# EAGLE board 3400 (EAGLE 9.6.2)
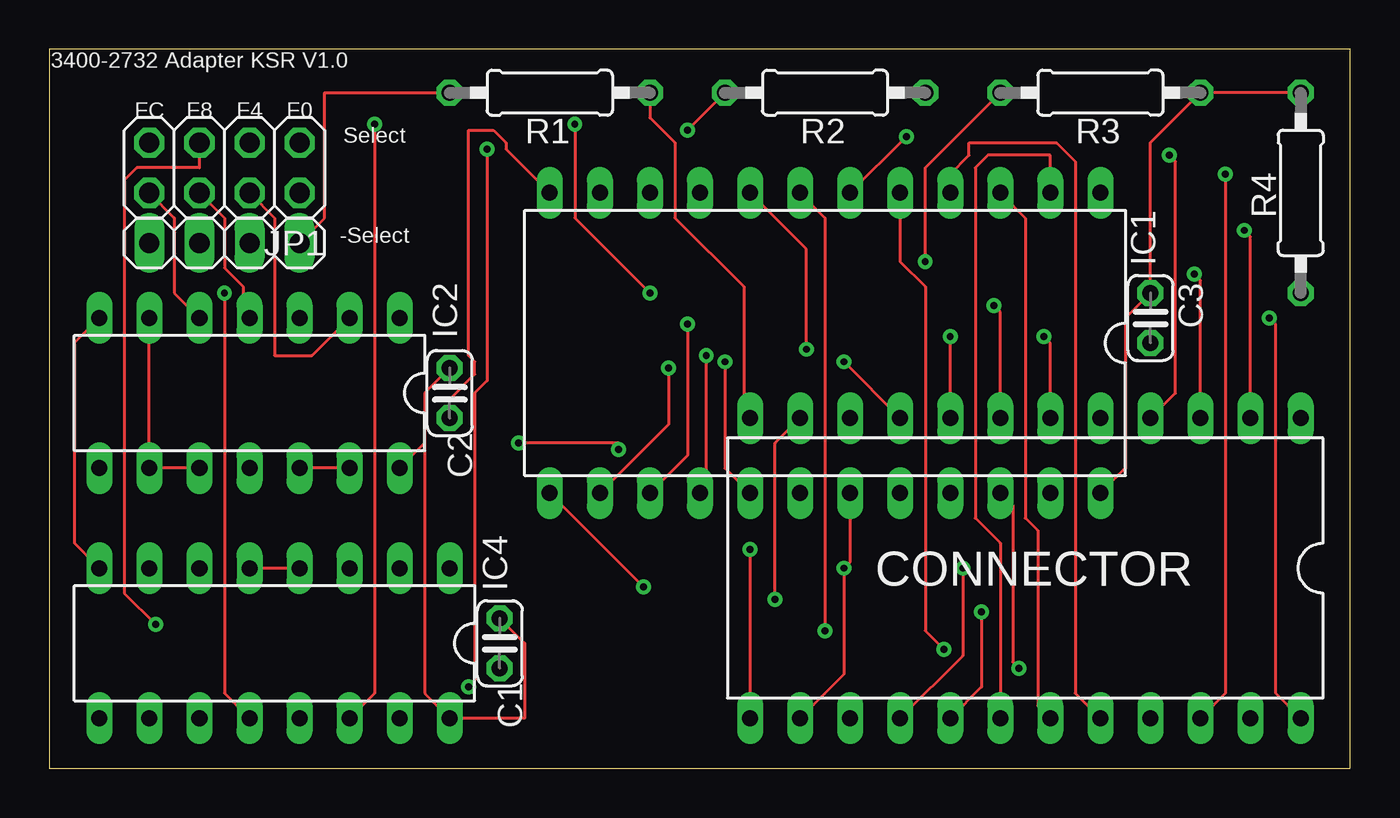
[diagram p0: board, top side]
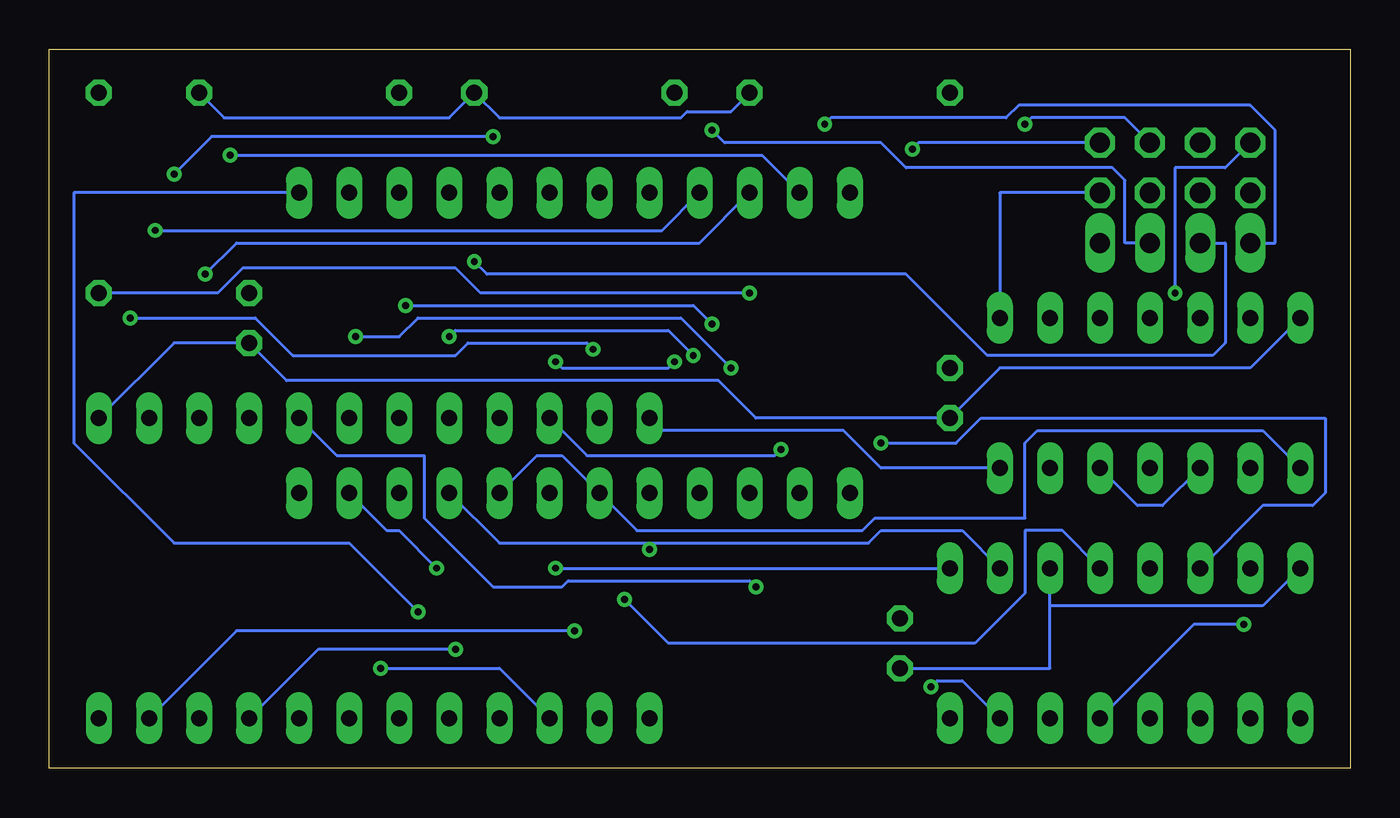
[diagram p1: board, bottom side, seen from below]

Size 66.02 x 36.5 mm. Coordinates in mm from the lower left corner, seen from the top.
Outline: 0,0 66.02,0 66.02,36.5 0,36.5 0,0
Copper layers (1*16): Top 0.035mm / dielectric 0.15mm / Bottom 0.035mm
Design rules "default *": minimum track width 6mil, minimum drill 0.35mm, track to track 15mil, track to pad 15mil, pad to pad 6mil, via to via 6mil, smd to smd 6mil, copper to edge 40mil, drill to drill 6mil, minimum pad ring 10mil, minimum via ring 8mil, stop-mask expansion 4mil, vias tented up to drill 0mil, thermal gap 10mil

## Footprints (pad centres in the part's own frame; a part is rotated, then mirrored left to right if it is on the bottom)
C025-024X044 = drill 0.813 octagon: 1 -1.27,0; 2 1.27,0
DIL24-6 = drill 0.813 long: 1 -13.97,-7.62; 2 -11.43,-7.62; 3 -8.89,-7.62; 4 -6.35,-7.62; 5 -3.81,-7.62; 6 -1.27,-7.62; 7 1.27,-7.62; 8 3.81,-7.62; 9 6.35,-7.62; 10 8.89,-7.62; 11 11.43,-7.62; 12 13.97,-7.62; 13 13.97,7.62; 14 11.43,7.62; 15 8.89,7.62; 16 6.35,7.62; 17 3.81,7.62; 18 1.27,7.62; 19 -1.27,7.62; 20 -3.81,7.62; 21 -6.35,7.62; 22 -8.89,7.62; 23 -11.43,7.62; 24 -13.97,7.62
DIL24 = drill 0.813 long: 1 -13.97,-7.62; 2 -11.43,-7.62; 3 -8.89,-7.62; 4 -6.35,-7.62; 5 -3.81,-7.62; 6 -1.27,-7.62; 7 1.27,-7.62; 8 3.81,-7.62; 9 6.35,-7.62; 10 8.89,-7.62; 11 11.43,-7.62; 12 13.97,-7.62; 13 13.97,7.62; 14 11.43,7.62; 15 8.89,7.62; 16 6.35,7.62; 17 3.81,7.62; 18 1.27,7.62; 19 -1.27,7.62; 20 -3.81,7.62; 21 -6.35,7.62; 22 -8.89,7.62; 23 -11.43,7.62; 24 -13.97,7.62
DIL14 = drill 0.813 long: 1 -7.62,-3.81; 2 -5.08,-3.81; 3 -2.54,-3.81; 4 0,-3.81; 5 2.54,-3.81; 6 5.08,-3.81; 7 7.62,-3.81; 8 7.62,3.81; 9 5.08,3.81; 10 2.54,3.81; 11 0,3.81; 12 -2.54,3.81; 13 -5.08,3.81; 14 -7.62,3.81
DIL16 = drill 0.813 long: 1 -8.89,-3.81; 2 -6.35,-3.81; 3 -3.81,-3.81; 4 -1.27,-3.81; 5 1.27,-3.81; 6 3.81,-3.81; 7 6.35,-3.81; 8 8.89,-3.81; 9 8.89,3.81; 10 6.35,3.81; 11 3.81,3.81; 12 1.27,3.81; 13 -1.27,3.81; 14 -3.81,3.81; 15 -6.35,3.81; 16 -8.89,3.81
2X04 = drill 1.016 octagon: 1 -3.81,-1.27; 2 -3.81,1.27; 3 -1.27,-1.27; 4 -1.27,1.27; 5 1.27,-1.27; 6 1.27,1.27; 7 3.81,-1.27; 8 3.81,1.27
1X04 = drill 1.016 long: 1 -3.81,0; 2 -1.27,0; 3 1.27,0; 4 3.81,0
0207/10 = drill 0.813 octagon: 1 -5.08,0; 2 5.08,0

## Placement (x,y rotation side)
C1  0.1uf  [C025-024X044]  22.86,6.35 270 top
C2  0.1uf  [C025-024X044]  20.32,19.05 270 top
C3  0.1uf  [C025-024X044]  55.88,22.86 270 top
CONNECTOR  [DIL24-6]  49.53,10.16 180 top
IC1  2732  [DIL24]  39.37,21.59 180 top
IC2  74LS20N  [DIL14]  10.16,19.05 180 top
IC4  74LS138N  [DIL16]  11.43,6.35 180 top
JP1  PINHD-2X4  [2X04]  8.89,30.48 180 top
JP2  PINHD-1X4  [1X04]  8.89,26.67 180 top
R1  10k  [0207/10]  25.4,34.29 180 top
R2  10k  [0207/10]  39.37,34.29 180 top
R3  10k  [0207/10]  53.34,34.29 180 top
R4  10k  [0207/10]  63.5,29.21 270 top

## Library data of the parts
C1-C3 = rcl; SPICEPREFIX: C
CONNECTOR = ic-package
IC1 = memory
IC2 IC4 = 74xx-us
JP1 JP2 = Connector; CATEGORY: CONNECTOR; SUB-CATEGORY: PIN-HEADER
R1-R4 = rcl; SPICEPREFIX: R

## Nets
-ROM-EN: CONNECTOR.11 IC4.4 IC4.5
A0: CONNECTOR.24 IC1.8
A1: CONNECTOR.23 IC1.7
A2: CONNECTOR.22 IC1.6
A3: CONNECTOR.21 IC1.5
A4: CONNECTOR.20 IC1.4
A5: CONNECTOR.19 IC1.3
A6: CONNECTOR.18 IC1.2
A7: CONNECTOR.17 IC1.1
A8: CONNECTOR.16 IC1.23
A9: CONNECTOR.15 IC1.22
A10: CONNECTOR.14 IC1.19 IC4.1
A11: CONNECTOR.13 IC1.21 IC4.2
A12-C: CONNECTOR.10 IC4.6
D0: CONNECTOR.2 IC1.9
D1: CONNECTOR.3 IC1.10
D2: CONNECTOR.4 IC1.11
D3: CONNECTOR.5 IC1.13
D4: CONNECTOR.6 IC1.14
D5: CONNECTOR.7 IC1.15
D6: CONNECTOR.8 IC1.16
D7: CONNECTOR.9 IC1.17
F0: IC2.1 JP1.2
F4: IC2.2 JP1.4
F8: IC2.4 JP1.6
FC: IC2.5 JP1.8
GND: C1.2 C2.2 C3.2 CONNECTOR.1 IC1.12 IC2.7 IC4.3 IC4.8
N$1: IC1.18 IC1.20 IC2.8
N$2: IC4.15 JP1.1
N$3: IC2.6 IC2.9 IC2.10 IC2.12 IC2.13
N$4: IC4.14 JP1.3
N$5: IC4.13 JP1.5
N$6: IC4.12 JP1.7
N$11: JP2.1 R1.2
N$12: JP2.2 R2.2
N$13: JP2.3 R3.2
N$14: JP2.4 R4.2
VCC: C1.1 C2.1 C3.1 CONNECTOR.12 IC1.24 IC2.14 IC4.16 R1.1 R2.1 R3.1 R4.1

## Tracks (layer width: path | path; a pad name or v marks a point on that pad's centre or on a via)
-ROM-EN  (via drill 0.35)
  Top 0.152: IC4.4 IC4.5 | CONNECTOR.11 36.83,16.51 v36.83,8.57
  Bottom 0.152: v36.83,8.57 34.61,6.35 19.05,6.35 16.51,8.89 16.51,12.06 14.61,12.06 IC4.4
A0  (via drill 0.35)
  Top 0.152: IC1.8 38.42,26.35 v38.42,21.27 | v61.91,22.86 62.23,22.54 62.23,3.81 CONNECTOR.24
  Bottom 0.152: v38.42,21.27 38.73,21.59 44.77,21.59 45.4,20.95 53.66,20.95 55.56,22.86 v61.91,22.86
A1  (via drill 0.35)
  Top 0.152: v39.37,6.99 39.37,27.94 IC1.7
  Bottom 0.152: CONNECTOR.23 56.52,6.99 v39.37,6.99
A2  (via drill 0.35)
  Top 0.152: CONNECTOR.22 59.69,3.81 v59.69,30.16 | IC1.6 v43.5,32.07
  Bottom 0.152: v59.69,30.16 57.78,32.07 v43.5,32.07
A3  (via drill 0.35)
  Top 0.152: v45.4,6.03 44.45,6.99 44.45,24.45 43.18,25.72 IC1.5
  Bottom 0.152: CONNECTOR.21 52.39,6.03 v45.4,6.03
A4
  Top 0.152: CONNECTOR.20 52.07,3.81 52.07,30.8 51.12,31.75 46.67,31.75 46.67,31.11 45.72,30.16 IC1.4
A5
  Top 0.152: CONNECTOR.19 50.16,3.17 50.16,12.06 49.53,12.7 49.53,27.94 IC1.3
A6
  Top 0.152: CONNECTOR.18 48.26,11.43 46.99,12.7 46.99,30.48 47.62,31.11 50.8,31.11 IC1.2
A7  (via drill 0.35)
  Top 0.152: CONNECTOR.17 47.31,4.13 v47.31,7.94
  Bottom 0.152: v47.31,7.94 50.8,11.43 59.69,11.43 64.77,16.51 64.77,29.21 IC1.1
A8  (via drill 0.35)
  Top 0.152: CONNECTOR.16 46.35,5.71 v46.35,10.16
  Bottom 0.152: v46.35,10.16 48.26,12.06 48.9,12.06 IC1.23
A9  (via drill 0.35)
  Top 0.152: v49.21,5.08 48.9,5.4 48.9,13.34 IC1.22
  Bottom 0.152: CONNECTOR.15 43.18,5.08 v49.21,5.08
A10  (via drill 0.35)
  Top 0.152: IC1.19 40.64,10.48 v40.32,10.16 40.32,4.76 CONNECTOR.14
  Bottom 0.152: v40.32,10.16 IC4.1
A11  (via drill 0.35)
  Top 0.152: v35.56,11.11 CONNECTOR.13
  Bottom 0.152: IC4.2 19.68,12.06 23.81,12.06 24.45,11.43 35.56,11.43 | 35.56,11.43 43.18,11.43 IC1.21 | 35.56,11.43 v35.56,11.11
A12-C  (via drill 0.35)
  Top 0.152: v23.81,16.51 28.89,16.51 v28.89,16.19
  Bottom 0.152: IC4.6 4.45,13.34 1.91,13.34 1.27,13.97 1.27,17.78 18.73,17.78 20,16.51 v23.81,16.51 | v28.89,16.19 29.21,15.88 38.73,15.88 CONNECTOR.10
D0  (via drill 0.35)
  Top 0.152: v60.64,27.3 60.96,26.99 CONNECTOR.2
  Bottom 0.152: IC1.9 34.92,27.3 v60.64,27.3
D1  (via drill 0.35)
  Top 0.152: v58.1,25.08 58.42,24.77 CONNECTOR.3
  Bottom 0.152: IC1.10 33.02,26.67 56.52,26.67 v58.1,25.08
D2  (via drill 0.35)
  Top 0.152: v56.83,31.11 57.15,30.8 57.15,19.05 CONNECTOR.4
  Bottom 0.152: IC1.11 29.84,31.11 v56.83,31.11
D3  (via drill 0.35)
  Top 0.152: v30.16,9.21 IC1.13
  Bottom 0.152: v30.16,9.21 30.48,9.53 39.69,9.53 40.01,9.21 43.5,9.21 46.99,12.7 46.99,15.88 51.44,15.88 CONNECTOR.5
D4  (via drill 0.35)
  Top 0.152: IC1.14 31.43,17.46 v31.43,20.32 | v50.48,21.91 50.8,21.59 CONNECTOR.6
  Bottom 0.152: v31.43,20.32 33.97,22.86 47.31,22.86 48.26,21.91 v50.48,21.91
D5  (via drill 0.35)
  Top 0.152: IC1.15 32.38,15.88 v32.38,22.54 | v47.94,23.5 48.26,23.18 CONNECTOR.7
  Bottom 0.152: v32.38,22.54 33.34,23.5 v47.94,23.5
D6  (via drill 0.35)
  Top 0.152: IC1.16 33.34,14.29 v33.34,20.95 | CONNECTOR.8 v45.72,21.91
  Bottom 0.152: v33.34,20.95 34.61,22.23 45.4,22.23 v45.72,21.91
D7  (via drill 0.35)
  Top 0.152: IC1.17 34.29,15.24 v34.29,20.64 | CONNECTOR.9 v40.32,20.64
  Bottom 0.152: v34.29,20.64 34.61,20.32 40.01,20.32 v40.32,20.64
F0
  Bottom 0.152: IC2.1 17.78,29.21 JP1.2
F4
  Top 0.152: IC2.2 13.34,20.95 11.43,20.95 11.43,27.94 JP1.4
F8
  Top 0.152: IC2.4 9.84,23.18 9.84,24.45 8.89,25.4 8.89,27.94 JP1.6
FC
  Top 0.152: IC2.5 6.35,24.13 6.35,27.94 JP1.8
GND
  Top 0.152: IC4.8 1.27,11.43 1.27,21.59 IC2.7 | IC1.12 23.18,31.43 23.18,31.75 22.54,32.38 21.27,32.38 21.27,20.95 21.59,20.64 21.59,20 20.32,18.73 C2.2
  Bottom 0.152: 15.24,8.26 15.24,5.08 C1.2 | 15.24,8.26 IC4.3 | CONNECTOR.1 59.69,21.59 C3.2 53.98,19.68 32.07,19.68 30.16,17.78 C2.2 17.78,20.32 5.08,20.32 IC2.7 | 15.24,8.26 4.45,8.26 IC4.8
N$1
  Bottom 0.152: IC1.20 41.27,15.88 40.01,15.88 IC1.18 36.2,12.06 24.77,12.06 24.13,12.7 16.51,12.7 16.51,16.51 15.88,17.14 4.45,17.14 IC2.8
N$2  (via drill 0.35)
  Top 0.152: v21.27,4.13 21.59,4.45 21.59,19.05 22.23,19.68 v22.23,31.43
  Bottom 0.152: IC4.15 19.68,4.45 20.95,4.45 v21.27,4.13 | v22.23,31.43 21.91,31.75 JP1.1
N$3
  Top 0.152: IC2.13 IC2.12 | IC2.10 IC2.9 IC2.6
  Bottom 0.152: IC2.12 10.79,13.34 9.53,13.34 IC2.10
N$4  (via drill 0.35)
  Top 0.152: IC4.14 16.51,3.81 v16.51,32.7
  Bottom 0.152: v16.51,32.7 16.19,33.02 11.43,33.02 JP1.3
N$5  (via drill 0.35)
  Top 0.152: v5.4,7.3 3.81,8.89 3.81,29.84 4.45,30.48 7.62,30.48 JP1.5
  Bottom 0.152: IC4.13 7.94,7.3 v5.4,7.3
N$6  (via drill 0.35)
  Top 0.152: IC4.12 8.89,3.81 v8.89,24.13
  Bottom 0.152: v8.89,24.13 8.89,30.48 6.35,30.48 JP1.7
N$11
  Top 0.152: R1.2 13.97,34.29 13.97,27.94 JP2.1
N$12  (via drill 0.35)
  Top 0.152: v32.38,32.38 R2.2
  Bottom 0.152: v32.38,32.38 31.75,31.75 23.81,31.75 22.54,30.48 12.06,30.48 11.43,29.84 11.43,26.67 JP2.2
N$13  (via drill 0.35)
  Top 0.152: R3.2 44.45,30.48 v44.45,25.72
  Bottom 0.152: v44.45,25.72 43.81,25.08 22.54,25.08 18.41,20.95 6.99,20.95 6.35,21.59 6.35,26.67 JP2.3
N$14  (via drill 0.35)
  Top 0.152: v30.48,24.13 26.67,27.94 v26.67,32.7
  Bottom 0.152: R4.2 57.47,24.13 56.2,25.4 45.4,25.4 44.13,24.13 v30.48,24.13 | v26.67,32.7 26.35,33.02 17.46,33.02 16.83,33.66 5.08,33.66 3.81,32.38 3.81,26.67 JP2.4
VCC
  Top 0.152: C1.1 24.13,6.35 24.13,2.54 IC4.16 19.05,3.81 19.05,16.51 | 19.05,16.51 IC2.14 | 19.05,16.51 19.05,19.05 C2.1 | R4.1 R3.1 55.88,31.75 C3.1 54.61,22.86 54.61,15.24 IC1.24 | CONNECTOR.12 35.24,18.1 35.24,24.45 31.75,27.94 31.75,31.75 30.48,33.02 R1.1
  Bottom 0.152: CONNECTOR.12 34.92,17.14 25.72,17.14 23.81,15.24 IC2.14 | R1.1 31.43,33.34 33.66,33.34 33.97,33.02 43.18,33.02 R2.1 45.72,33.02 57.15,33.02 R3.1

## Text on the board
tNames: 3400-2732 Adapter KSR V1.0 | FC | F8 | F4 | F0 | Select | -Select